# Altium PCB TypeC_Mini.PcbDoc
Units mil, origin at the board's own origin, x right, y up, seen from the top; angles counter-clockwise.
Board outline 450 x 395 mil, 2 copper layers (Top Layer, Bottom Layer), stack 37.8 mil thick; 2 components, 4 nets, 40 pads, 4 vias.
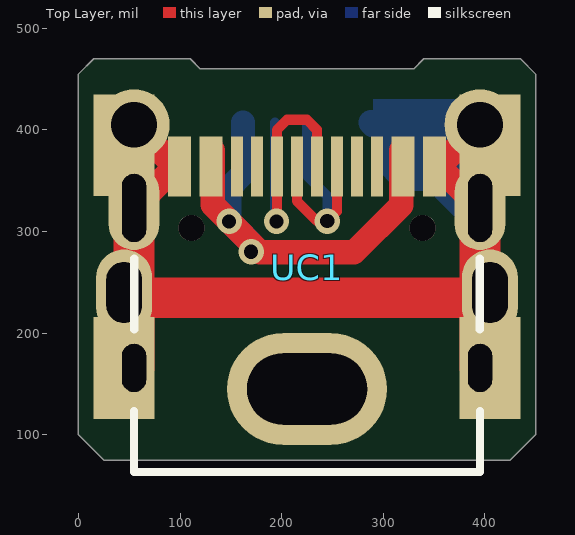
[diagram p0: Top Layer view]
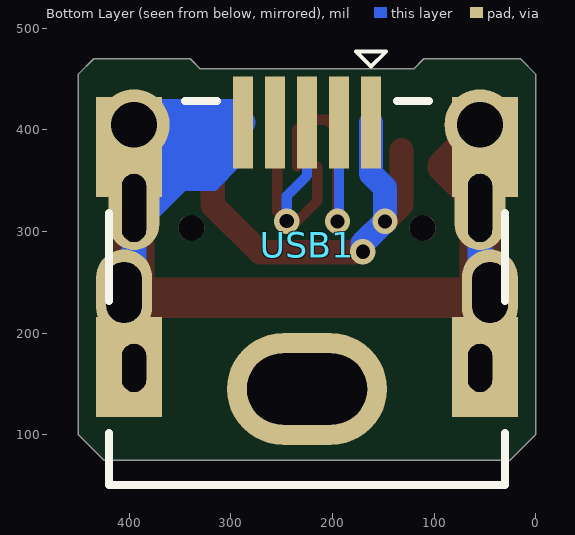
[diagram p1: Bottom Layer view, seen from below]

## Layer stack, top to bottom
Top Solder: solder mask 0.4, Solder Resist, Dk 3.5
Top Layer: signal copper 1.4
Dielectric 1: dielectric 35, FR-4, Dk 4.8
Bottom Layer: signal copper 1.4
Bottom Solder: solder mask 0.4, Solder Resist, Dk 3.5

## Board outline
0,100 0,455 15,470 110,470 120,460 330,460 340,470 435,470 450,455 450,100 425,75 25,75

## Design rules (kind name [scope] priority, off if disabled: settings)
Clearance [All] p1: gap=6 ignorepadtopadclearanceinfootprint=FALSE
ComponentClearance [All] p1: gap=0 collisioncheckmode=3 verticalgap=0 showdistances=FALSE
PlaneConnect [All] p1: planeconnectstyle=Direct reliefexpansion=20 reliefentries=4 reliefconductorwidth=10 reliefairgap=10
PolygonConnect [All] p1: connectstyle=Direct reliefconductorwidth=10 reliefentries=4 polygonreliefangle="90 Angle" airgapwidth=10
RoutingVias [All] p1: holewidth=14 width=25 viastyle="Through Hole" minholewidth=12 minwidth=24 maxholewidth=28 maxwidth=50
SolderMaskExpansion [All] p1: expansion=4
Width [All] p1: maxlimit=60 minlimit=6 preferedwidth=10
28 further rules are at their usual default settings.

## Components (designator, comment, footprint, x,y, rotation, side; value= is the part's Value field where it differs from the comment)
UC1 "TypeC" Type-C_8.64.5.82.12pin 225,260 r270 top
USB1 "USB-5P" USB-MINI-A 225,285 r0 bottom locked

## Footprints (in the part's own frame and the unit in brackets; to place one, negate y for a bottom-side part, rotate by r counter-clockwise, add the part's x,y. Pads: shape width x height; smd on the part's side, far side on the other; paste and mask are expansions set on the pad)
Type-C_8.64.5.82.12pin [mm]
  round 0.65 hole 0.65: 0(-1.105,2.89) 0(-1.105,-2.89)
  oval 1.6x1 hole 0.6 slot 1.2 at 0 deg: 1(2.395,4.325) 2(2.395,-4.325)
  oval 2.1x1.27 hole 0.6 slot 1.7 at 0 deg: 3(-1.605,-4.325) 4(-1.605,4.325)
  rect 1.5x0.3 smd: A1(-2.642,-3.327) A4(-2.642,-2.54) A5(-2.642,-1.254) A6(-2.642,-0.254) A7(-2.642,0.246) A8(-2.642,1.246) A9(-2.642,2.54) A12(-2.642,3.327) B1(-2.642,3.048) B4(-2.642,2.261) B5(-2.642,1.746) B6(-2.642,0.746) B7(-2.642,-0.754) B8(-2.642,-1.754) B9(-2.642,-2.261) B12(-2.642,-3.048)
  silkscreen extent -0.34,-4.33 4.99,4.33, body extent -2.49,-4.47 5.41,4.47, height 3.23
USB-MINI-A [mm] "MINI型USB，7.9*7.5*4.1mm"
  rect 0.5x2.3 smd: 1(-1.6,-3.108) 2(-0.8,-3.108) 3(0,-3.108) 4(0.8,-3.108) 5(1.6,-3.108)
  rect 1.651x2.5 smd: 5(-4.45,-2.5) 5(-4.45,3) 5(4.45,-2.5) 5(4.45,3)
  silkscreen extent -4.95,-4.89 4.95,5.95

## Part data
UC1: library part USB_Type-C, "TypeC_SinglePin_Short"
USB1: "微型USB母座", 学习资源=ww

## Free pads (board coordinates)
  oval 55x85 hole 35 slot 60 at 90 deg: 3(45,240) 3(405,240)
  round 70 hole 45: 3(54.72,405) 3(395.28,405)
  oval 157.48x110 hole 70 slot 118.11 at 0 deg: 3(225,145)
  rect 60x100 smd: 4(45,165.71) 4(45,385) 4(405,165.71) 4(405,385)

## Via types
v1: diameter 25, hole 14, Top Layer to Bottom Layer, tented both sides, 4 vias

## Nets (pads, with @x,y where several pads share a name; then routed paths per layer and width w, separated by ;. In a path a pad name is that pad's centre, name@x,y a point inside that pad or via, vN(x,y) a via of type N, cw(c..) or ccw(c..) an arc to the next point about the centre after c; other vN are vias at no path point)
D+: UC1.A6 UC1.B6 USB1.3 | length 235.1
  Top Layer w10: UC1.A6 215,330 234.69,310.31 v1(245,310.31) 254.37,319.68 UC1.B6
  Bottom Layer w10: USB1.3 225,355 245,335 v1(245,310.31)
D-: UC1.A7 UC1.B7 USB1.2 | length 272
  Top Layer w10: v1(195,310) 195.31,310.31 UC1.B7 195.31,400 205.31,410 225,410 234.68,400.32 UC1.A7
  Bottom Layer w10: USB1.2 193.51,311.49 v1(195,310)
GND: pad.3@45,240 pad.3@54.72,405 pad.3@395.28,405 pad.3@405,240 pad.4 UC1.1 UC1.2 UC1.3 UC1.4 UC1.A1 UC1.A12 UC1.B1 UC1.B12 USB1.5 | length 1471.1
  Top Layer w25: UC1.3 54.72,405 94,365.72 UC1.A1 94,362.46 UC1.3 ; UC1.A12@356,362.46 UC1.A12 356,365.72 395.28,405 UC1.4 UC1.A12@356,362.46
  Top Layer w40: UC1.2 pad.3@54.72,235 ; UC1.3 pad.3@54.72,235 ; UC1.1 pad.3@395.28,235 ; UC1.4 pad.3@395.28,235 ; pad.3@54.72,235 pad.3@395.28,235
  Bottom Layer w25: UC1.2 UC1.3 ; USB1.5@287.99,407.36 290.36,405 pad.3@395.28,405 ; UC1.1 UC1.4
VIN: UC1.A4 UC1.A9 UC1.B4 UC1.B9 USB1.1 | length 474.1
  Top Layer w24: UC1.B9@132.04,380 132.04,326.24 v1(148.28,310) 178.78,279.5 271.22,279.5 317.65,325.92 UC1.B4@317.65,380
  Bottom Layer w24: USB1.1 162.01,357.01 148.28,343.28 v1(148.28,310) 170,288.28 v1(170,280)
pads on no net: UC1.0 UC1.A5 UC1.A8 UC1.B5 UC1.B8 USB1.4

## Polygon pours and split planes (outlines as drawn)
no net on Top Layer "Top Layer-No Net" (solid, pour order 4): 15,490

## Other copper
Bottom Layer:
  region net GND: 290,430 382.36,430 405,407.36 405,319.72 395.28,310 375,310 345,340 315,340 290,365

## Silkscreen, mask and mechanical layers (free items; w line width, h text height)
Mechanical 1:
  the board outline again, w10